# Altium PCB Tigershark 3D R1.8.PcbDoc (part 4 of 4)
Units mil, origin at the board's own origin, x right, y up, seen from the top; angles counter-clockwise.
Board outline 5500 x 4600 mil, 4 copper layers (Top Layer, Groun Plane, Power Plane, Bottom Layer), stack 61.73 mil thick; 307 components, 237 nets, 994 pads, 1215 vias.
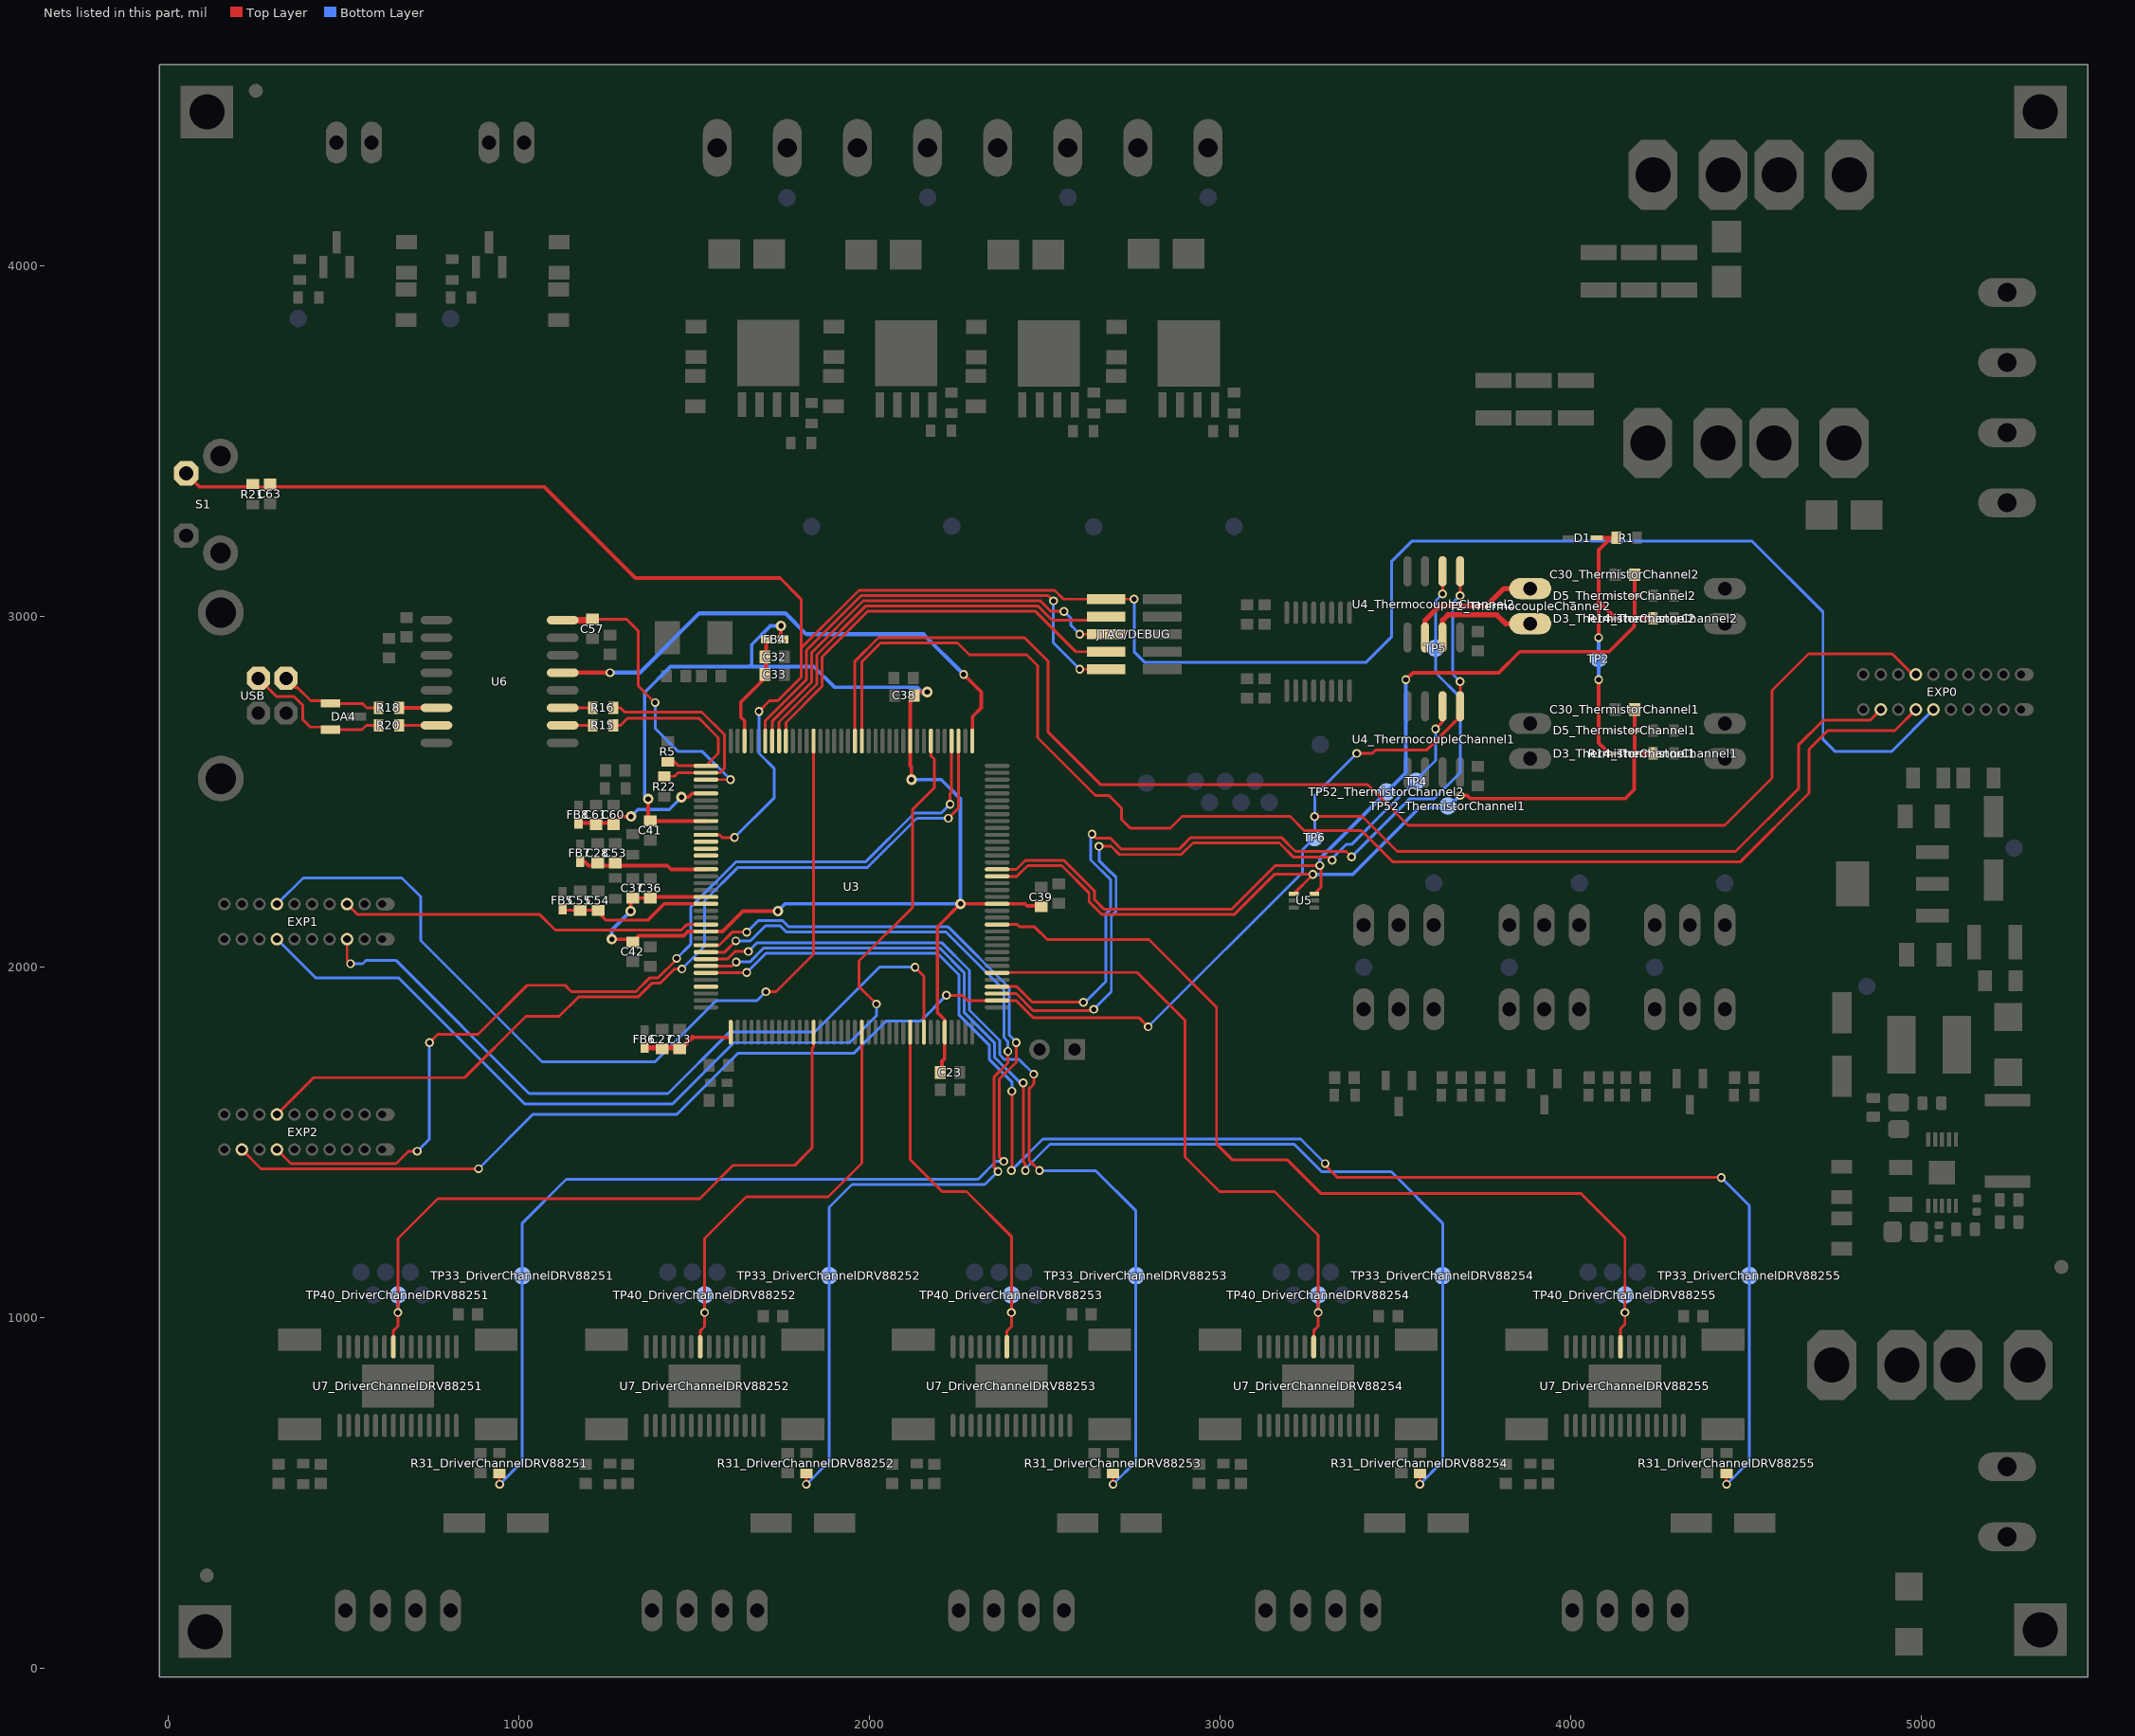
[diagram p6: the nets of this part, all layers, seen from the top]

## Via types
v1: diameter 25, hole 15, Top Layer to Bottom Layer, tented both sides, 594 vias
v2: diameter 30, hole 15, Top Layer to Bottom Layer, tented both sides, 518 vias
v3: diameter 19.68, hole 7.87, Top Layer to Bottom Layer, tented both sides, 75 vias
v4: diameter 50, hole 28, Top Layer to Bottom Layer, tented both sides, 10 vias
v5: diameter 45, hole 20, Top Layer to Bottom Layer, tented both sides, 9 vias
v6: diameter 30, hole 15, Top Layer to Bottom Layer, 9 vias

## Nets (pads, with @x,y where several pads share a name; then routed paths per layer and width w, separated by ;. In a path a pad name is that pad's centre, name@x,y a point inside that pad or via, vN(x,y) a via of type N, cw(c..) or ccw(c..) an arc to the next point about the centre after c; other vN are vias at no path point) (continued)
NetT2_ThermocoupleChannel2_1: T2_ThermocoupleChannel2.1 U4_ThermocoupleChannel2.3 | length 316.1
  Top Layer w15: U4_ThermocoupleChannel2.3@3635,2940.51 3635,2990 3650,3005 3789.49,3005 3814.49,2980 T2_ThermocoupleChannel2.1@3885,2980
NetT2_ThermocoupleChannel2_2: T2_ThermocoupleChannel2.2 U4_ThermocoupleChannel2.2 | length 386.5
  Top Layer w15: U4_ThermocoupleChannel2.2@3585,2940.51 3585,2989.49 3625.51,3030 3760,3030 3810,3080 T2_ThermocoupleChannel2.2@3885,3080
NRST: U3.69
OVREF: D1.2 D3_ThermistorChannel1.2 D3_ThermistorChannel2.2 R1.1 TP2.1 | length 769.5
  Top Layer w12: D1.2@4074.37,3225 4115,3225 4080,3190 4080,3043.43 ; v1(4080,2820) 4080,2640 4110,2610 D3_ThermistorChannel1.2@4128.43,2610 ; v1(4080,2940) 4080,3043.43 ; D3_ThermistorChannel2.2@4128.43,2995 4080,3043.43
  Bottom Layer w12: v1(4080,2820) v1(4080,2940)
R_N: DA4.1 R18.2 USB.2 | length 298.5
  Top Layer w8: USB.2@336,2824.21 362.71,2797.5 368.86,2797.5 406.46,2759.9 455.1,2759.9 DA4.1@462.6,2752.4 553.51,2752.4 565.91,2740 R18.2@599.59,2740
R_P: DA4.2 R20.2 USB.3 | length 432.3
  Top Layer w8: USB.3@257,2824.21 308.71,2772.5 358.51,2772.5 383.5,2747.51 383.5,2706.72 405.12,2685.1 455.1,2685.1 DA4.2@462.6,2677.6 552.6,2677.6 565,2690 R20.2@599.59,2690
REF1: R31_DriverChannelDRV88251.2 TP33_DriverChannelDRV88251.1 U3.63 | length 3755.7
  Top Layer w8: v1(945,525) R31_DriverChannelDRV88251.2@945,555.47 ; U3.63@1533.54,2062.68 1571.57,2062.68 1608.9,2100 v1@1653.9,2100 ; v1(2383,1446.15) 2370,1459.15 2370,1680 2418.9,1728.9 v1(2418.9,1785)
  Bottom Layer w8: v1(945,525) 1010,590 1010,1270 1135,1395 2310,1395 2361.15,1446.15 v1(2383,1446.15) ; v1(1650,2100) 1683.5,2133.5 1751.5,2133.5 1770,2115 2225,2115 2398.9,1941.1 2398.9,1805.96 2399.85,1805 2400.11,1805 2418.9,1786.21 v1(2418.9,1785)
REF2: R31_DriverChannelDRV88252.2 TP33_DriverChannelDRV88252.1 U3.64 | length 2876.5
  Top Layer w8: U3.64@1533.54,2042.99 1586.89,2042.99 v1(1618.9,2075) ; v1(1820,525) R31_DriverChannelDRV88252.2@1820,555.47 ; v1(2366.4,1417.5) 2355,1428.9 2355,1686.21 2395,1726.21 v1(2395,1760)
  Bottom Layer w8: v1(1618.9,2075) 1660,2075 1703.5,2118.5 1745.29,2118.5 1763.79,2100 2218.79,2100 2383.9,1934.89 2383.9,1799.74 2386.5,1797.14 2386.5,1796.18 2392.68,1790 2393.9,1790 2395,1788.9 v1(2395,1760) ; v1(1820,525) 1885,590 1885,1315 1950,1380 2328.9,1380 v1@2368.9,1420
REF3: R31_DriverChannelDRV88253.2 TP33_DriverChannelDRV88253.1 U3.65 | length 2652.7
  Top Layer w8: U3.65@1533.54,2023.31 1595.07,2023.31 1616.77,2045 v1@1653.9,2045 ; v1(2468.9,1695) 2468.9,1666.77 2455,1652.87 2455,1450 v1(2485,1420) ; v1(2695,525) R31_DriverChannelDRV88253.2@2695,555.47
  Bottom Layer w8: v1(1655,2045) 1680,2070 2206.36,2070 2285,1991.36 2285,1877.43 2371.5,1790.93 2371.5,1750.27 2385.27,1736.5 2427.4,1736.5 v1(2468.9,1695) ; v1(2485,1420) 2645,1420 2760,1305 2760,590 v1(2695,525)
REF4: R31_DriverChannelDRV88254.2 TP33_DriverChannelDRV88254.1 U3.66 | length 3547.7
  Top Layer w8: U3.66@1533.54,2003.62 1607.52,2003.62 v1@1618.9,2015 ; v1(2438.9,1670) 2438.9,1444.89 2445,1438.79 v1(2445,1420) ; v1(3570,525) R31_DriverChannelDRV88254.2@3570,555.47
  Bottom Layer w8: v1(1620,2015) 1658.79,2015 1698.79,2055 2200.15,2055 2270,1985.15 2270,1871.21 2356.5,1784.71 2356.5,1744.05 2430.55,1670 v1(2438.9,1670) ; v1(2445,1420) 2445,1425 2515,1495 3211.77,1495 3290.27,1416.5 3488.5,1416.5 3635,1270 TP33_DriverChannelDRV88254.1@3635,1120 3635,590 v1(3570,525)
REF5: R31_DriverChannelDRV88255.2 TP33_DriverChannelDRV88255.1 U3.67 | length 4478
  Top Layer w8: U3.67@1533.54,1983.94 v1@1652.83,1983.94 ; v1(2405,1420) 2406.5,1421.5 v1(2406.5,1646.5) 2410,1650 v1@2415,1645 ; v1@3300,1435 3335,1400 v1(4430,1400) ; v1(4445,525) R31_DriverChannelDRV88255.2@4445,555.47
  Bottom Layer w8: v1(1650,1985) 1705,2040 2193.93,2040 2255,1978.93 2255,1865 2341.5,1778.5 2341.5,1737.84 2406.5,1672.84 v1(2406.5,1646.5) ; v1(2405,1420) 2495,1510 3230,1510 v1(3300,1440) ; v1(4430,1400) 4510,1320 TP33_DriverChannelDRV88255.1@4510,1120 4510,590 v1(4445,525)
REF_EXP1: EXP1.8 U3.101 | length 2190.8
  Top Layer w8: EXP1.8@510,2080 510,2020 v1(520,2010) ; v1(2130,2000) 2155.59,1974.41 U3.101@2155.59,1814.65
  Bottom Layer w8: v1(520,2010) 555,2010 565,2020 649.08,2020 1029.08,1640 1425.92,1640 1600.92,1815 1843.23,1815 2028.23,2000 v1(2130,2000)
REF_EXP2: EXP1.13 U3.60 | length 1066.6
  Top Layer w8: EXP1.13@510,2180 520,2180 520,2170 539,2151 1059,2151 1104,2106 1463.37,2106 1479.1,2121.73 U3.60@1533.54,2121.73
RESET: C63.2 EXP0.5 JTAG/DEBUG.10 R21.1 S1.1 U3.47 | length 7061.5
  Top Layer w8: R21.1@232.47,3370 R21.1@241,3378.53 249.53,3370 282.44,3370 C63.2@290,3377.56 C63.2@297.56,3370 ; U3.47@1533.54,2377.64 1572.36,2377.64 1580,2370 v1(1615,2370) ; v1(1685,2730) 1715,2760 1738.79,2760 1805,2826.21 1805,2910 ; 1745,3110 1805,3050 1805,2910 ; v1(2755,3050) JTAG/DEBUG.10@2675.08,3050 2553.23,3050 2528.23,3075 1970,3075 1805,2910
  Top Layer w10: S1.1@51,3409 90,3370 R21.1@232.47,3370 ; C63.2@297.56,3370 1072.67,3370 1332.67,3110 1745,3110
  Bottom Layer w8: v1(1615,2370) 1728.9,2483.9 1728.9,2566.1 1685,2610 v1(1685,2730) ; v1(2755,3050) 2755,2900 2786,2869 3415.77,2869 3490,2943.23 3490,3158.23 3546.77,3215 4518.23,3215 4720,3013.23 4720,2650 4755,2615 4915,2615 EXP0.5@5035,2735
RXD0: EXP2.17 U3.3 | length 2573.5
  Top Layer w8: EXP2.17@310,1580 415,1685 845.15,1685 1020.15,1860 1115.15,1860 1170.15,1915 1340.15,1915 1380.15,1955 1403.79,1955 1443.79,1995 v1(1465,1995) ; v1(2225,2425) 2254.02,2454.02 U3.3@2254.02,2645.35
  Bottom Layer w8: v1(1465,1995) 1530,2060 1530,2190 1625,2285 1995,2285 2135,2425 v1(2225,2425)
RXD1: EXP0.17 U3.18 | length 3995.8
  Top Layer w8: U3.18@1958.74,2645.35 1958.74,2872.82 2025.92,2940 2442.43,2940 2510,2872.43 2510,2670.15 2658.65,2521.5 3420.63,2521.5 3452.19,2489.94 3452.19,2489.71 3536.9,2405 4439.85,2405 4575,2540.15 4575,2790.15 4678.85,2894 4917.01,2894 4964,2847.01 4964,2846 4975,2835 EXP0.17@4985,2835
SCLK: EXP0.2 EXP2.2 TP6.1 U3.110 U4_ThermocoupleChannel1.5 U4_ThermocoupleChannel2.5 | length 6544.2
  Top Layer w8: EXP2.2@210,1480 265,1425 v1(885,1425) ; v1(2220,1920) 2265,1920 2279.8,1905.2 U3.110@2364.25,1905.2 2417.38,1905.2 2466.07,1856.5 2768.5,1856.5 v1(2795,1830) ; v1(3270,2430) 3405.84,2430 3505.84,2330 4470.92,2330 4650,2509.08 4650,2633.79 4721.21,2705 4855,2705 EXP0.2@4885,2735 ; v1(3390,2610) 3435,2610 3445,2620 3590,2620 3685,2715 U4_ThermocoupleChannel1.5@3685,2744.49 v1(3685,2815) ; v1(3685,3060) U4_ThermocoupleChannel2.5@3685,3129.49
  Bottom Layer w8: v1(885,1425) 1040,1580 1450.77,1580 1625.77,1755 1956.21,1755 2047.71,1846.5 2146.5,1846.5 v1(2220,1920) ; v1(2795,1830) 3235,2270 3235,2335 TP6.1@3270,2370 v1(3270,2430) 3270,2490 v1(3390,2610) ; v1(3685,2815) 3664,2836 3664,3039 v1(3685,3060)
SHDN: U3.50
SPD: U3.1 U6.13 | length 1517.7
  Top Layer w10: v1(2268.9,2835) 2318.9,2785 2318.9,2740 2293.9,2715 U3.1@2293.9,2635
  Top Layer w12: U6.13@1125.12,2840 v1(1260,2840)
  Bottom Layer w12: v1(1260,2840) 1345,2840 1515,3010 1760,3010 1820.5,2949.5 2154.4,2949.5 v1(2268.9,2835)
STEP1: TP40_DriverChannelDRV88251.1 U3.85 U7_DriverChannelDRV88251.22 | length 1984.7
  Top Layer w8: U7_DriverChannelDRV88251.22@642.2,917.2 642.2,963.42 655,976.21 v1(655,1015) 655,1226.36 768.64,1340 1515.92,1340 1610.92,1435 1786.87,1435 1835.94,1484.07 1835.94,1768.37 1840.63,1773.06 U3.85@1840.63,1814.65
  Bottom Layer w8: v1(655,1015) TP40_DriverChannelDRV88251.1@655,1065
STEP2: TP40_DriverChannelDRV88252.1 U3.92 U7_DriverChannelDRV88252.22 | length 1275.5
  Top Layer w8: U7_DriverChannelDRV88252.22@1517.2,917.2 1517.2,962.2 1530,975 v1(1530,1015) 1530,1226.36 1648.64,1345 1882.57,1345 1978.43,1440.85 U3.92@1978.43,1814.65
  Bottom Layer w8: v1(1530,1015) TP40_DriverChannelDRV88252.1@1530,1065
STEP3: TP40_DriverChannelDRV88253.1 U3.99 U7_DriverChannelDRV88253.22 | length 1113
  Top Layer w8: U3.99@2116.22,1814.65 2116.22,1451.35 2207.57,1360 2276.97,1360 2405,1231.97 v1(2405,1015) 2405,975 2392.2,962.2 U7_DriverChannelDRV88253.22@2392.2,917.2
  Bottom Layer w8: v1(2405,1015) TP40_DriverChannelDRV88253.1@2405,1065
STEP4: TP40_DriverChannelDRV88254.1 U3.114 U7_DriverChannelDRV88254.22 | length 1828.6
  Top Layer w8: U3.114@2364.25,1983.94 2365.32,1985 2763.64,1985 2900,1848.64 2900,1458.64 2998.64,1360 3155.29,1360 3280,1235.29 v1(3280,1015) 3280,976.21 3267.2,963.42 U7_DriverChannelDRV88254.22@3267.2,917.2
  Bottom Layer w8: v1(3280,1015) TP40_DriverChannelDRV88254.1@3280,1065
STEP5: TP40_DriverChannelDRV88255.1 U3.121 U7_DriverChannelDRV88255.22 | length 2755.9
  Top Layer w8: U3.121@2364.25,2121.73 2422.05,2121.73 2428.79,2115 2471.21,2115 2507.59,2078.62 2797.3,2078.62 2990,1885.92 2990,1495.92 3035.92,1450 3192.57,1450 3287.57,1355 4028.64,1355 4155,1228.64 v1(4155,1015) 4155,981.21 4142.2,968.42 U7_DriverChannelDRV88255.22@4142.2,917.2
  Bottom Layer w8: v1(4155,1015) TP40_DriverChannelDRV88255.1@4155,1065
STEP_EXP1: EXP1.4 U3.7 | length 2905.8
  Top Layer w8: v1(2020,1895) 1970.61,1944.39 1970.61,2018.18 2122.75,2170.33 2122.75,2449.72 2184.9,2511.87 2184.9,2593.89 2175.28,2603.51 U3.7@2175.28,2645.35
  Bottom Layer w8: EXP1.4@310,2080 420,1970 656.65,1970 1016.65,1610 1438.35,1610 1613.35,1785 1943.23,1785 2020,1861.77 v1(2020,1895)
STEP_EXP2: EXP1.17 U3.24 | length 2588
  Top Layer w8: v1(1705,1930) 1733.79,1930 1840.63,2036.84 U3.24@1840.63,2645.35
  Bottom Layer w8: EXP1.17@310,2180 385,2255 666.36,2255 720,2201.36 720,2076.36 1066.36,1730 1388.64,1730 1563.64,1905 1680,1905 v1(1705,1930)
TC_CS1: TP4.1 U3.111 U4_ThermocoupleChannel1.6 | length 2097.9
  Top Layer w8: U3.111@2364.25,1924.88 2418.9,1924.88 2467.29,1876.5 2636.5,1876.5 v1(2640,1880) ; v1(2655,2345) 2689.6,2345 2713.1,2321.5 2889.44,2321.5 2922.94,2355 3168.93,2355 3210.43,2313.5 3311.5,2313.5 v1(3320,2305) ; v1(3615,2680) 3635,2700 U4_ThermocoupleChannel1.6@3635,2744.49
  Bottom Layer w8: v1(2640,1880) 2690,1930 2690,2146.1 2703.5,2159.6 2703.5,2256.61 2690.11,2270 2688.9,2270 2655,2303.9 v1(2655,2345) ; v1(3320,2305) 3320,2310 3360,2350 3375,2350 3489,2464 3489.91,2464 3511,2485.09 3511,2486 3615,2590 v1(3615,2680)
TC_CS2: TP5.1 U3.112 U4_ThermocoupleChannel2.6 | length 2620.6
  Top Layer w8: U3.112@2364.25,1944.57 2420.43,1944.57 2465,1900 v1(2610,1900) ; v1(2635,2380) 2646.5,2368.5 2687.31,2368.5 2719.31,2336.5 2883.23,2336.5 2916.73,2370 3175.15,2370 3215.15,2330 3360,2330 v1(3375,2315) ; v1(3635,3065) U4_ThermocoupleChannel2.6@3635,3129.49
  Bottom Layer w8: v1(2610,1900) 2615,1900 2675,1960 2675,2152.32 2688.5,2165.82 2688.5,2249.18 2631.5,2306.18 2631.5,2376.5 v1(2635,2380) ; v1(3375,2315) 3540,2480 3610,2480 3685,2555 3685,2770 3615,2840 3615,3045 v1(3635,3065)
TCK/SWDCLK: JTAG/DEBUG.4 U3.28 | length 1194
  Top Layer w8: U3.28@1761.89,2645.35 1761.89,2697.99 1865,2801.1 1865,2885.15 1994.85,3015 2473.49,3015 2588.49,2900 JTAG/DEBUG.4@2675.08,2900
TDI: JTAG/DEBUG.8 U3.29 | length 1193.9
  Top Layer w8: U3.29@1742.2,2645.35 1742.2,2699.52 1850,2807.32 1850,2891.36 1988.64,3030 2481.21,3030 2521.21,2990 2665.08,2990 JTAG/DEBUG.8@2675.08,3000
TDO/SWO: JTAG/DEBUG.6 U3.30 | length 1251
  Top Layer w8: U3.30@1722.52,2645.35 1722.52,2701.05 1835,2813.53 1835,2897.57 1982.43,3045 2487.43,3045 2517.43,3015 v1(2555,3015) ; v1(2600,2950) JTAG/DEBUG.6@2675.08,2950
  Bottom Layer w8: v1(2555,3015) 2575,2995 2575,2975 v1(2600,2950)
THERM_AN1: C30_ThermistorChannel1.2 D3_ThermistorChannel1.1 D5_ThermistorChannel1.2 R14_ThermistorChannel1.1 TP52_ThermistorChannel1.1 U3.128 U5.4 | length 2417.8
  Top Layer w8: U3.128@2364.25,2259.53 2365.25,2258.53 2419.74,2258.53 2451.21,2290 2548.79,2290 2626.5,2212.29 2626.5,2187.29 2663.79,2150 3040,2150 3155,2265 v1(3265,2265) ; U5.4@3210.47,2209.69 v1@3265,2264.21
  Top Layer w10: v1@3265,2264.21 v1(3265,2265) ; v1(3685,2490) 3705,2490 3714,2481 4156,2481 4181.57,2506.57 D3_ThermistorChannel1.1@4181.57,2610 R14_ThermistorChannel1.1@4235.47,2610 ; D3_ThermistorChannel1.1@4182.56,2610.98 C30_ThermistorChannel1.2@4182.56,2735
  Bottom Layer w10: v1(3265,2265) 3378.63,2265 3568.63,2455 3650,2455 v1(3685,2490)
THERM_AN2: C30_ThermistorChannel2.2 D3_ThermistorChannel2.1 D5_ThermistorChannel2.2 R14_ThermistorChannel2.1 TP52_ThermistorChannel2.1 U3.129 U5.3 | length 2692.6
  Top Layer w8: U3.129@2364.25,2279.21 2419.21,2279.21 2445,2305 2555,2305 2641.5,2218.5 2641.5,2193.5 2670,2165 3032.37,2165 3157.37,2290 v1(3285,2290) 3288.5,2286.5 3288.5,2228.66 U5.3@3269.53,2209.69
  Top Layer w10: v1(3530,2820) 3550,2840 3795,2840 3855,2900 4110,2900 4181.57,2971.57 D3_ThermistorChannel2.1@4181.57,2995 R14_ThermistorChannel2.1@4235.47,2995 ; D3_ThermistorChannel2.1@4182.56,2995.98 C30_ThermistorChannel2.2@4182.56,3120
  Bottom Layer w10: v1(3285,2290) 3285,2310 3530,2555 v1(3530,2820)
TMS/SWDIO: JTAG/DEBUG.2 U3.31 | length 1384
  Top Layer w8: U3.31@1702.83,2645.35 1702.83,2702.83 1820,2820 1820,2903.79 1976.21,3060 2510,3060 v1(2525,3045) ; v1(2600,2850) JTAG/DEBUG.2@2675.08,2850
  Bottom Layer w8: v1(2525,3045) 2525,2925 v1(2600,2850)
TXD0: EXP2.4 U3.4 | length 2783.4
  Top Layer w8: EXP2.4@310,1480 350,1440 650,1440 685,1475 v1(710,1475) ; v1(745,1785) 768.75,1808.75 884.04,1808.75 1023.79,1948.5 1131.5,1948.5 1150,1930 1333.93,1930 1373.93,1970 1397.57,1970 1450,2022.43 v1(1450,2025) ; v1(2230,2465) 2230,2495 2234.33,2499.33 U3.4@2234.33,2645.35
  Bottom Layer w8: v1(710,1475) 745,1510 v1(745,1785) ; v1(1450,2025) 1490,2065 1490,2171.21 1618.79,2300 1988.79,2300 2128.79,2440 2205,2440 v1(2230,2465)
TXD1: EXP0.4 U3.17 | length 3933.8
  Top Layer w8: U3.17@1978.43,2645.35 1978.43,2871.29 2032.13,2925 2251.77,2925 2285.27,2891.5 2448.5,2891.5 2480,2860 2480,2655 2645,2490 2683.23,2490 2718.5,2454.73 2718.5,2422.16 2744.16,2396.5 2858.37,2396.5 2891.87,2430 3200,2430 3240,2390 3403.41,2390 3493.41,2300 4483.35,2300 4680,2496.65 4680,2621.36 4733.64,2675 4925,2675 EXP0.4@4985,2735
UD_N: R18.1 U6.6 | length 106.2
  Top Layer w10: R18.1@658.65,2740 U6.6@764.88,2740
UD_P: R20.1 U6.7 | length 106.2
  Top Layer w8: R20.1@658.65,2690 U6.7@764.88,2690
UI_N: R16.2 U6.11 | length 85.4
  Top Layer w8: U6.11@1125.12,2740 1175,2740 R16.2@1210.47,2740
UI_P: R15.2 U6.10 | length 85.4
  Top Layer w8: U6.10@1125.12,2690 1190,2690 R15.2@1210.47,2690
UMCU_N: R16.1 R22.1 U3.38 | length 621.8
  Top Layer w8: R16.1@1269.53,2740 1290,2740 1302,2728 1521.35,2728 1586.9,2662.46 1586.9,2567.8 1573.9,2554.8 U3.38@1533.54,2554.8 1454.17,2554.8 1443.9,2544.53 R22.1@1418.9,2544.53
UMCU_P: R5.1 R15.1 U3.37 | length 544.8
  Top Layer w8: R15.1@1269.53,2690 1290,2690 1310,2710 1513.9,2710 1568.9,2655 1568.9,2609.84 U3.37@1533.54,2574.49 1454.88,2574.49 1443.9,2585.47 R5.1@1418.9,2585.47
VBUS: C57.2 U3.39 U6.16 | length 870.5
  Top Layer w8: C57.2@1210,2992.56 1307.44,2992.56 1340,2960 1340,2803.06 v1@1388.06,2755 ; U3.39@1533.54,2535.12 v1@1603.9,2535.12
  Top Layer w20: U6.16@1125.12,2990 C57.2@1207.44,2990
  Bottom Layer w8: v1(1388.9,2755) 1388.9,2681.1 1455,2615 1523.9,2615 v1(1603.9,2535)
VDDANA: C13.2 C27.2 FB6.2 U3.73 | length 257.4
  Top Layer w10: 1495,1800 U3.73@1603.9,1800
  Top Layer w15: FB6.2@1358.9,1770 1465,1770 1495,1800
VDDBU: C28.2 C53.2 FB7.2 U3.52 | length 373.8
  Top Layer w10: FB7.2@1168.9,2301.38 1187.52,2301.38 1198.9,2290 1423.9,2290 1434.68,2279.21 U3.52@1533.54,2279.21
VDDIN: C54.2 C55.2 FB5.2 U3.57 | length 458
  Top Layer w8: FB5.2@1120.12,2176.38 FB5.2@1124.05,2172.44 ; FB5.2@1122.83,2162.44 1220.12,2162.44 1248.56,2134 1367.9,2134 1368.9,2135 ; C54.2@1220.12,2172.44 C54.2@1227.56,2165
  Top Layer w10: 1368.9,2135 1414.68,2180.79 U3.57@1533.54,2180.79
VDDOUT: C23.2 C36.2 C37.2 C38.2 C39.2 C41.2 C42.2 FB4.1 U3.10 U3.45 U3.56 U3.61 U3.104 U3.124 | length 4514.7
  Top Layer w10: v2(1265,2080) C42.2@1327.44,2080 ; v2(1318.9,2160) 1318.9,2197.44 1368.9,2197.44 1371.93,2200.47 U3.56@1533.54,2200.47 ; C42.2@1323.9,2072.56 1341.34,2090 1470,2090 1482.05,2102.05 U3.61@1533.54,2102.05 1580.94,2102.05 1638.9,2160 v2(1738.9,2160) ; v2(1368.9,2480) 1368.9,2417.56 C41.2@1369.43,2417.03 ; C41.2@1369.45,2417.01 U3.45@1533.54,2417.01 ; FB4.1@1747.52,2935 v2(1747.52,2973.62) ; v2(2120,2535) 2120,2571.1 2116.22,2574.88 U3.10@2116.22,2645.35 2116.22,2769.76 2121.46,2775 2131.46,2785 v2(2165,2785) ; C23.2@2206.77,1705 2206.77,1731.77 2214.65,1739.65 U3.104@2214.65,1814.65 2214.65,1849.81 2193.9,1870.56 2193.9,2115 v2(2259.68,2180.79) U3.124@2364.25,2180.79 2444.12,2180.79 2449.91,2175 C39.2@2488.9,2175
  Bottom Layer w10: v2(1265,2080) 1265,2106.1 v2(1318.9,2160) ; v2(1368.9,2480) 1358.9,2490 1358.9,2783.9 1432.5,2857.5 1656.4,2857.5 ; v2(1738.9,2160) 1759.68,2180.79 v2(2259.68,2180.79) 2259.68,2480.32 2205,2535 v2(2120,2535) ; v2(1747.52,2973.62) 1717.52,2973.62 1663.9,2920 1663.9,2865 1656.4,2857.5 ; v2(2165,2785) 2158.9,2785 2153.9,2780 2134.9,2799 1899.9,2799 1841.4,2857.5 1656.4,2857.5
VDDPLL: C32.2 C33.2 FB4.2 U3.34 | length 326.1
  Top Layer w10: U3.34@1643.78,2645.35 1643.78,2702.53 1633,2713.31 1633,2756.34 1705.28,2828.62 1705.28,2930 FB4.2@1700.28,2935
VDDUTMI: C60.2 C61.2 FB8.2 U3.41 | length 390
  Top Layer w10: FB8.2@1168.9,2411.38 C60.2@1264.96,2411.38 ; C60.2@1276.46,2415 1291.46,2430 v2(1320,2430) ; v2(1463.9,2485) 1483.9,2485 1494.65,2495.75 U3.41@1533.54,2495.75
  Bottom Layer w10: v2@1323.9,2425 1323.9,2433.9 1340,2450 1428.9,2450 v2(1463.9,2485)
XIN32: U3.48
XOUT32: U3.49
pads on no net: FD1.1 FD2.1 FD3.1 JTAG/DEBUG.7 S1.3 S1.4 U3.32 U3.127 U3.136 U3.137 U3.138 U4_ThermocoupleChannel1.8 U4_ThermocoupleChannel2.8 U7_DriverChannelDRV88251.18 U7_DriverChannelDRV88251.19 U7_DriverChannelDRV88251.23 U7_DriverChannelDRV88251.27 U7_DriverChannelDRV88252.18 U7_DriverChannelDRV88252.19 U7_DriverChannelDRV88252.23 U7_DriverChannelDRV88252.27 U7_DriverChannelDRV88253.18 U7_DriverChannelDRV88253.19 U7_DriverChannelDRV88253.23 U7_DriverChannelDRV88253.27 U7_DriverChannelDRV88254.18 U7_DriverChannelDRV88254.19 U7_DriverChannelDRV88254.23 U7_DriverChannelDRV88254.27 U7_DriverChannelDRV88255.18 U7_DriverChannelDRV88255.19 U7_DriverChannelDRV88255.23 U7_DriverChannelDRV88255.27 USB.P$1 USB.P$2

## Polygon pours and split planes (outlines as drawn)
GND on Top Layer "Top Layer-No Net" (solid, remove dead copper, pour order 75): 225,0 655,0 655,100 460,100 460,505 290,505 290,610 310,610 310,720 815,720 815,660 870,660 870,720 1000,720 1000,645 970,645 970,590 870,590 870,540 910,540 910,575 970,575 970,500 845,500 845,100 655,100 655,0 1090,0 1090,1300 845,1300 845,875 500,875 500,1300 225,1300
+12VCC3 on Top Layer "Mechanical 15-No Net" (solid, remove dead copper, pour order 57): 3610,3975 3610,4035 3610,4550 4510,4550 4510,4030 4445,4030 4380,4030 4375,4025 4375,3975
GND on Top Layer "Mechanical 15-No Net" (solid, remove dead copper, pour order 54): 5450,3625 5160,3625 3690,3625 3610,3625 3610,3790 3610,3965 3690,3965 4385,3965 4385,4020 4510,4020 4510,3890 5080,3890 5080,3795 5450,3795
GND on Top Layer "Top Layer-No Net" (solid, remove dead copper, pour order 71): 3725,0 4155,0 4155,100 3960,100 3960,505 3790,505 3790,610 3810,610 3810,720 4315,720 4315,660 4370,660 4370,720 4500,720 4500,645 4470,645 4470,590 4370,590 4370,540 4410,540 4410,575 4470,575 4470,500 4345,500 4345,100 4155,100 4155,0 4590,0 4590,1300 4345,1300 4345,875 4000,875 4000,1300 3725,1300
GND on Top Layer "Top Layer-No Net" (solid, remove dead copper, pour order 72): 2850,0 3280,0 3280,100 3085,100 3085,505 2915,505 2915,610 2935,610 2935,720 3440,720 3440,660 3495,660 3495,720 3625,720 3625,645 3595,645 3595,590 3495,590 3495,540 3535,540 3535,575 3595,575 3595,500 3470,500 3470,100 3280,100 3280,0 3715,0 3715,1300 3470,1300 3470,875 3125,875 3125,1300 2850,1300
GND on Top Layer "Top Layer-No Net" (solid, remove dead copper, pour order 73): 1975,0 2405,0 2405,100 2210,100 2210,505 2040,505 2040,610 2060,610 2060,720 2565,720 2565,660 2620,660 2620,720 2750,720 2750,645 2720,645 2720,590 2620,590 2620,540 2660,540 2660,575 2720,575 2720,500 2595,500 2595,100 2405,100 2405,0 2840,0 2840,1300 2595,1300 2595,875 2250,875 2250,1300 1975,1300
GND on Top Layer "Top Layer-No Net" (solid, remove dead copper, pour order 74): 1100,0 1530,0 1530,100 1335,100 1335,505 1165,505 1165,610 1185,610 1185,720 1690,720 1690,660 1745,660 1745,720 1875,720 1875,645 1845,645 1845,590 1745,590 1745,540 1785,540 1785,575 1845,575 1845,500 1720,500 1720,100 1530,100 1530,0 1965,0 1965,1300 1720,1300 1720,875 1375,875 1375,1300 1100,1300
+12VCC2 on Top Layer "Top Layer-No Net" (solid, remove dead copper, pour order 56): 1660,4554.75 1440,4555 1440,3805 1535,3805 1535,3990 1660,3990
NetD18_1 on Top Layer "Top Layer-No Net" (solid, remove dead copper, pour order 65): 3465,4565 3600,4565 3600,4095 3600,3630 3465,3630 3065,3630 3065,3660 3015,3660 3015,3650 2810,3650 2810,3575 2670,3575 2670,3630 2745,3630 2745,3965 2865,3965 2865,4564.32
+12VCC2 on Top Layer "Top Layer-No Net" (solid, pour order 99): 4765,3370 4495,3370 4495,3620 3065,3620 3065,3275 4170,3275 4170,3160 4765,3160
+12VCC3 on Top Layer "Top Layer-No Net" (solid, remove dead copper, pour order 83): 2860,4554.32 2660,4555 2660,3805 2735,3805 2735,3985 2860,3985
NetD16_1 on Top Layer "Top Layer-No Net" (solid, remove dead copper, pour order 69): 2650,4554.32 2650,3660 2605,3660 2605,3655 2405,3655 2405,3575 2270,3575 2270,3630 2345,3630 2345,3975 2465,3975 2465,4554.32
+12VCC2 on Top Layer "Top Layer-No Net" (solid, remove dead copper, pour order 82): 2460,4555 2255,4555 2255,3805 2335,3805 2335,3985 2460,3985
NetD14_1 on Top Layer "Top Layer-No Net" (solid, remove dead copper, pour order 76): 2245,4555 2245,3660 2000,3660 2000,3570 1865,3570 1865,3650 1940,3650 1940,3970 2060,3970 2060,4555
+12VCC2 on Top Layer "Top Layer-No Net" (solid, remove dead copper, pour order 81): 2054,4554.75 1860,4555 1860,3800 1930,3800 1930,3985 2055,3985
NetD12_1 on Top Layer "Top Layer-No Net" (solid, remove dead copper, pour order 79): 1850,4554.75 1850,3655 1605,3655 1605,3575 1470,3575 1470,3655 1545,3655 1545,3975 1665,3975 1665,4554.75
GND on Top Layer "Top Layer-No Net" (solid, remove dead copper, pour order 84): 2814.5,3644.19 2814.5,3559.19 2669.5,3559.19 2669.5,3223.08 3004.5,3223.08 3004.5,3559.19 2954.5,3559.19 2954.5,3644.19
GND on Top Layer "Top Layer-No Net" (solid, remove dead copper, pour order 85): 2414.5,3644.19 2414.5,3559.19 2269.5,3559.19 2269.5,3223.08 2604.5,3223.08 2604.5,3559.19 2554.5,3559.19 2554.5,3644.19
GND on Top Layer "Top Layer-No Net" (solid, remove dead copper, pour order 86): 2008.5,3644.61 2008.5,3559.61 1863.5,3559.61 1863.5,3223.51 2198.5,3223.51 2198.5,3559.61 2148.5,3559.61 2148.5,3644.61
GND on Top Layer "Top Layer-No Net" (solid, remove dead copper, pour order 87): 1615,3645 1615,3560 1470,3560 1470,3223.89 1805,3223.89 1805,3560 1755,3560 1755,3645
GND on Top Layer "Top Layer-No Net" (solid, remove dead copper, pour order 58): 835,3930 885,3930 885,3920 930,3920 930,4035 945,4035 945,4105 990,4105 990,4035 1070,4035 1070,3800 1150,3800 1150,3475 835,3475
GND on Top Layer "Top Layer-No Net" (solid, remove dead copper, pour order 59): 400,3930 450,3930 450,3920 495,3920 495,4035 510,4035 510,4105 555,4105 555,4035 635,4035 635,3800 710,3800 710,3475 400,3475
+12VCC2 on Top Layer "Top Layer-No Net" (solid, remove dead copper, pour order 96): 1145,4050 1145,4540 975,4540 975,4115 1000,4115 1000,4050
+12VCC2 on Top Layer "Top Layer-No Net" (solid, remove dead copper, pour order 95): 710,4045 710,4550 540,4550 540,4115 565,4115 565,4045
NetD10_1 on Top Layer "Top Layer-No Net" (solid, remove dead copper, pour order 93): 935,4045 935,4115 965,4115 965,4580 720,4580 720,4045
NetD11_1 on Top Layer "Top Layer-No Net" (solid, remove dead copper, pour order 94): 500,4045 500,4115 530,4115 530,4580 300,4580 300,4045
GND on Top Layer "Top Layer-No Net" (solid, remove dead copper, pour order 62): 4925,175 4925,0 4930,-5 5250,-5 5250,200 5450,200 5450,465 5030,465 5030,175
NetF3_1 on Top Layer "Top Layer-No Net" (solid, remove dead copper, pour order 67): 5450,475 5450,1100 5030,1100 5030,475
+12VCC1 on Top Layer "Top Layer-No Net" (solid, remove dead copper, pour order 77): 5020,1100 4600,1100 4600,0 4910,0 4910,185 5020,185
NetF2_1 on Top Layer "Top Layer-No Net" (solid, remove dead copper, pour order 64): 5090,3800 5450,3800 5450,4550 4520,4550 4520,3900 5090,3900
GND on Top Layer "SMPS" (solid, pour order 55): 5111,1537 5139,1509 5139,1421 5189,1371 5312,1371 5312,1496 5263,1545 5261,1547 5128,1547 5111,1547
NetC40_2 on Top Layer "SMPS" (solid, pour order 53): 5045,1551 5067.77,1573.77 5067.77,1618 5174,1724.23 5174,1740 5190,1756 5266,1756 5304,1794 5304,1880 5286,1898 5204,1898 5091,1898 5045,1852 5034,1841 5034,1569 5034,1554 5037,1551
NetD2_A on Top Layer "SMPS" (solid, pour order 51): 5078,1554 5214,1554 5263,1554 5312,1603 5312,1716 5288,1740 5199,1740 5187,1728 5187,1711 5106,1630 5079,1603 5079,1557
NetF1_1 on Top Layer "Top Layer-No Net" (solid, remove dead copper, pour order 97): 5450,3375 5450,3620 4505,3620 4505,3469.66 4505,3397.27 4505,3375
NetF1_1 on Top Layer "Top Layer-No Net" (solid, remove dead copper, pour order 98): 5450,3375 5450,3620 4505,3620 4505,3469.66 4505,3397.27 4505,3375
GND on Top Layer "Mechanical 15-No Net" (solid, remove dead copper, pour order 52): 4775,3370 4775,3025 5450,3025 5450,3370
+12VCC2 on Bottom Layer "Mechanical 15-No Net" (solid, remove dead copper, pour order 68): 4495,3615 4495,3275 3190,3275 3190,3660 3075,3660 1470,3660 1470,4065 0,4065 0,4550 2650,4550 2645,4545 2645,3965 3600,3965 3600,3800 3600,3750 3600,3615 3685,3615
NetF1_1 on Bottom Layer "Mechanical 15-No Net" (solid, remove dead copper, pour order 80): 5470,3375 4505,3375 4505,3450 4505,3615 5470,3615
GND on Bottom Layer "Mechanical 15-No Net" (solid, remove dead copper, pour order 70): 5470,2965 5470,3370 4775,3370 4775,2965
GND on Bottom Layer "Top Layer-No Net" (solid, remove dead copper, pour order 88): 3725,1400 3725,475 4590,475 4590,1400
GND on Bottom Layer "Top Layer-No Net" (solid, remove dead copper, pour order 89): 2850,1400 2850,475 3715,475 3715,1400
GND on Bottom Layer "Top Layer-No Net" (solid, remove dead copper, pour order 90): 1975,1400 1975,475 2840,475 2840,1400
GND on Bottom Layer "Top Layer-No Net" (solid, remove dead copper, pour order 91): 1100,1400 1100,475 1965,475 1965,1400
GND on Bottom Layer "Top Layer-No Net" (solid, pour order 92): 225,1400 225,475 1090,475 1090,1400
+12VCC1 on Bottom Layer "Top Layer-No Net" (solid, remove dead copper, pour order 100): 4600,1100 5020,1100 5020,0 225,0 225,465 4600,465
+12VCC3 on Bottom Layer "Top Layer-No Net" (solid, remove dead copper, pour order 60): 2675,4550 2675,3975 4370,3975 4370,4070 4510,4070 4510,4550
GND on Bottom Layer "Top Layer-No Net" (solid, remove dead copper, pour order 78): 5450,3625 3690,3625 3610,3625 3610,3795 3610,3960 3690,3960 4385,3960 4385,4020 4510,4020 4510,3895 5085,3895 5085,3795 5450,3795
NetF2_1 on Bottom Layer "Top Layer-No Net" (solid, remove dead copper, pour order 63): 5090,3800 5450,3800 5450,4550 4520,4550 4520,3900 5090,3900
GND on Bottom Layer "Top Layer-No Net" (solid, remove dead copper, pour order 61): 4925,175 4925,0 4930,-5 5250,-5 5250,200 5450,200 5450,465 5030,465 5030,175
NetF3_1 on Bottom Layer "Top Layer-No Net" (solid, remove dead copper, pour order 66): 5450,475 5450,1100 5030,1100 5030,475
INPUT_GND on Groun Plane (split plane): 939.9,2455.1 -4.9,2455.1 -4.9,3094.9 939.9,3094.9
GND on Groun Plane (split plane): 5454.9,-4.9 -4.9,-4.9 -4.9,2444.9 945,2444.9 946.95,2445.29 948.6,2446.4 949.71,2448.05 950.1,2450 950.1,3100 949.71,3101.95 948.6,3103.6 946.95,3104.71 945,3105.1 -4.9,3105.1 -4.9,4554.9 5454.9,4554.9
NetF1_1 on Power Plane (split plane): 5454.9,3370.1 4505.1,3370.1 4505.1,3614.9 5454.9,3614.9
+5VCC on Power Plane (split plane): 5454.9,1170.1 5033.1,1170.1 5033.1,1346 5032.71,1347.95 5031.6,1349.6 5029.95,1350.71 5028,1351.1 4720.1,1351.1 4720.1,1906.9 5454.9,1906.9
+12VCC3 on Power Plane (split plane): 4494.9,3875.1 3345.1,3875.1 3345.1,4090 3344.71,4091.95 3343.6,4093.6 3341.95,4094.71 3340,4095.1 2655.1,4095.1 2655.1,4554.9 4494.9,4554.9
NetF2_1 on Power Plane (split plane): 5454.9,3625.1 4505.1,3625.1 4505.1,4554.9 5454.9,4554.9
NetF3_1 on Power Plane (split plane): 5454.9,475.1 5032.1,475.1 5032.1,1159.9 5454.9,1159.9
3.3VCC on Power Plane (split plane): 4260.9,741.1 4040.1,741.1 4040.1,864.9 4260.9,864.9
3.3VCC on Power Plane (split plane): 3390.9,743.1 3170.1,743.1 3170.1,864.9 3390.9,864.9
+12VCC2 on Power Plane (split plane): 2644.9,4090 2645.29,4088.05 2646.4,4086.4 2648.05,4085.29 2650,4084.9 3334.9,4084.9 3334.9,3870 3335.29,3868.05 3336.4,3866.4 3338.05,3865.29 3340,3864.9 4494.9,3864.9 4494.9,3620 4494.9,3365 4494.9,3265.1 3040.1,3265.1 3040.1,3673.89 3039.71,3675.84 3038.6,3677.5 3036.95,3678.6 3035,3678.99 1475.1,3678.99 1475.1,4055 1474.71,4056.95 1473.6,4058.6 1471.95,4059.71 1470,4060.1 -4.9,4060.1 -4.9,4554.9 2644.9,4554.9
3.3VCC on Power Plane (split plane): 1464.9,3675 1465.01,3674.45 1464.9,3673.89 1465.29,3671.94 1466.4,3670.29 1468.05,3669.18 1470,3668.79 3029.9,3668.79 3029.9,3260 3030.29,3258.05 3031.4,3256.4 3033.05,3255.29 3035,3254.9 4500,3254.9 4501.95,3255.29 4503.6,3256.4 4504.71,3258.05 4505.1,3260 4505.1,3359.9 5454.9,3359.9 5454.9,1917.1 4715,1917.1 4713.05,1916.71 4711.4,1915.6 4710.29,1913.95 4709.9,1912 4709.9,1351.1 4419.71,1351.1 4419.7,1351.1 4418.73,1350.9 4417.76,1350.71 4417.75,1350.7 4416.94,1350.16 4416.11,1349.6 4416.1,1349.6 4415.55,1348.77 4415,1347.95 4415,1347.94 4414.81,1346.96 4414.62,1346 4414.62,1345.99 4415.89,875.1 2292.87,875.1 2291.95,875.71 2290,876.1 2288.05,875.71 2287.13,875.1 1643.11,875.1 1642.6,875.6 1640.95,876.71 1639,877.1 1637.05,876.71 1635.4,875.6 1635.06,875.1 -4.9,875.1 -4.9,4049.9 1464.9,4049.9
3.3VCC on Power Plane (split plane): 1636.9,742.1 1422.1,742.1 1422.1,864.9 1636.9,864.9
+12VCC1 on Power Plane (split plane): 5022.9,1167.87 5022.29,1166.95 5021.9,1165 5021.9,470 5022.29,468.05 5023.4,466.4 5025.05,465.29 5027,464.9 5454.9,464.9 5454.9,-4.9 -4.9,-4.9 -4.9,864.9 536.9,864.9 536.9,736 537.29,734.05 538.4,732.4 539.4,731.4 541.05,730.29 543,729.9 767,729.9 768.95,730.29 770.6,731.4 771.71,733.05 772.1,735 772.1,864.9 1411.9,864.9 1411.9,737 1412.29,735.05 1413.4,733.4 1415.05,732.29 1417,731.9 1642,731.9 1643.95,732.29 1645.6,733.4 1646.71,735.05 1647.1,737 1647.1,864.9 2284.9,864.9 2284.9,733 2285.29,731.05 2286.4,729.4 2288.05,728.29 2290,727.9 2522,727.9 2523.95,728.29 2525.6,729.4 2526.71,731.05 2527.1,733 2527.1,864.9 3159.9,864.9 3159.9,738 3160.29,736.05 3161.4,734.4 3163.05,733.29 3165,732.9 3396,732.9 3397.95,733.29 3399.6,734.4 3400.71,736.05 3401.1,738 3401.1,864.9 4029.9,864.9 4029.9,736 4030.29,734.05 4031.4,732.4 4033.05,731.29 4035,730.9 4265,730.9 4266.95,731.29 4268.6,732.4 4269.6,733.4 4270.71,735.05 4271.1,737 4271.1,864.9 4421,864.9 4421.01,864.9 4421.97,865.09 4422.95,865.29 4422.96,865.29 4422.96,865.3 4423.77,865.84 4424.6,866.4 4424.61,866.4 4425.16,867.22 4425.71,868.05 4425.71,868.06 4425.72,868.06 4425.91,869.04 4426.1,870 4426.1,870.01 4424.83,1340.9 5022.9,1340.9
3.3VCC on Power Plane (split plane): 2516.9,738.1 2295.1,738.1 2295.1,864.9 2516.9,864.9
3.3VCC on Power Plane (split plane): 761.9,740.1 547.1,740.1 547.1,864.9 761.9,864.9

## Keep-outs
Keep-Out Layer:
  lines w10: 0,0 5450,0 5450,4550 0,4550 0,0

## Other copper
Top Layer:
  text "AVR" at 215,3730 h160 r90
Bottom Layer:
  text "G" at 175,1340 h150 r90
  text "Tigershark 3D V1" at 135,1155 h130 r90
Groun Plane (plane layer: these items are gaps in the copper):
  lines w10: -30,2450 75,2450 945,2450 945,3100 45,3100 -30,3100
Power Plane (plane layer: these items are gaps in the copper):
  lines w10: -25,-25 -24,870 4421,870 4419.71,1346 4715,1346 ; -25,4055 815,4055 1470,4055 1470,3675 ; 542,870 542,736 543,735 767,735 767,870 ; 1417,870 1417,737 1642,737 1642,869 1639,872 ; 1470,3673.89 2715,3673.89 3035,3673.89 3035,3260 3350,3260 4500,3260 4500,3365 ; 2290,871 2290,733 2522,733 2522,870 ; 2650,4588.11 2650,4090 3340,4090 3340,3870 3640,3870 ; 3165,870 3165,738 3396,738 3396,870 ; 3620,3870 4500,3870 ; 4035,870 4035,736 4265,736 4266,737 4266,870 ; 4500,4585 4500,3620 ; 5027,1165 5027,470 5478,470 ; 5475,1912 4715,1912 4715,1346 ; 5485,1165 5028,1165 5028,1346 4840.5,1346 4715,1346 ; 5485,3365 5115,3365 4500,3365 ; 5485,3620 4500,3620 ; 4500,3365 4500,3620

## Silkscreen, mask and mechanical layers (free items; w line width, h text height)
Top Overlay:
  lines w10: 10,3515 375,3515 ; 225,3040 1330,3040 ; 1250,4250 1250,4500 ; 2520,3090 3020,3090 ; 3090,1770 3295,1770 ; 3095,2040 3295,2040 ; 3205,4050 3205,4535 ; 3310,1465 3935,1465 ; 3490,3265 4095,3265 ; 4145,3265 4645.25,3265 ; 15,15 15,195 195,195 195,15 170,15 15,15 ; 20,4350 175,4350 200,4350 200,4530 20,4530 20,4350 ; 5250,20 5430,20 5430,200 5250,200 5250,20 ; 5250,4350 5250,4530 5430,4530 5430,4350 5250,4350
  lines w20: 75,3700 250,3700 250,3975 75,3975 75,3700
  text "S" at 3360,4385 h1200
  text "HEATBED 15A" at 4115,4370 h120
  text "S" at 3620,4365 h100
  text "FANs" at 1235,4245 h130 r90
  text "FAN-1" at 810,4125 h120
  text "FAN-0" at 370,4120 h120
  text "HEAT-0" at 1505,4113.11 h100
  text "HEAT-1" at 1890,4112.11 h100
  text "HEATBED" at 2701,4112.32 h100
  text "HEAT-2" at 2304,4111.11 h100
  text "HEATERs" at 3185,4055 h130 r90
  text "b" at 3195,3655 h270
  text "HEATBED" at 5011,3628 h100 r90
  text "12V - 24V" at 5081,3623 h100 r90
  text "HTR MOSFETs" at 4100,3605 h120
  text "RESET" at 10,3530 h155
  text "Thermocouples" at 3475,3275 h110
  text "Thermistors" at 4140,3275 h110
  text "MOSFETs" at 5001,3228 h100 r90
  text "12V - 24V" at 5081,3228 h100 r90
  text "TC-0" at 3765,3190 h90
  text "THM-0" at 4315,3190 h90
  text "GALVANIC USB ISOLATION" at 220,3055 h110
  text "K-Smart Port" at 4685,2945 h155
  text "THM-1" at 4315,2810 h90
  text "TC-1" at 3765,2805 h90
  text "Tigershark" at 2450,2500 h220
  text "Prototype Rev 1V9" at 2860,2440 h80
  text "Designed By" at 2648.57,2380 h90
  text "Adam Vadala-Roth" at 2535,2300 h90
  text "GPIO Port" at 10,2290 h155
  text "X" at 3495,2280 h300
  text "Y" at 3910,2280 h300
  text "Z" at 4360,2280 h300
  text "3.3V LDO" at 5425,2055 h150 r90
  text "MAX" at 3090,2050 h120
  text "Logic Supply" at 4740,2050 h90 r90
  text "ERASE" at 2435,1825 h75
  text "MIN" at 3090,1780 h120
  text "Smart Port" at 5,1690 h155
  text "ENDSTOPS" at 3305,1475 h155
  text "+5V DCDC" at 5435,1330 h150 r90
  text "Motors/Logic" at 4620,990 h120
  text "STEPPER DRIVERS" at 120,360 h130 r90
  text "2.5A Per Phase" at 210,360 h130 r90
  text "PWR IN 2" at 5010,304.5 h90 r90
  text "12V - 24V" at 5075,304.5 h90 r90
  text "X" at 245,20 h300
  text "Y" at 1120,20 h300
  text "Z" at 1995,20 h300
  text "E" at 2865,20 h300
  text "0" at 3560,20 h300
  text "E" at 3755,20 h300
  text "1" at 4435,20 h300
Bottom Overlay:
  drawing of 2 lines, arcs and shapes, not listed
  text "Tigershark 3D" at 4195,1370 h250
  text "Powered by TinyG2CORE" at 4505,1215 h140
  text "Based On the Work of Ultimachine," at 4505,920 h135
  text "Arduino, RepRap, and Synthetos.com" at 4510,830 h135
  text "Developed by Adam Vadala-Roth in" at 4505,725 h135
  text "collaboration with Johnny Russel" at 4500,625 h135
  text "and Alden Hart" at 4495,530 h135
  text "#YOLO" at 3460,375 h200
  text "G" at 3780,260 h310
  text "S" at 4195,260 h2000
  text "S" at 4510,230 h175
  text "Released as Open Source Hardware Under the CERN Open Hardware Liscense" at 4500,25 h125
Top Solder:
  text "AVR" at 215,3730 h160 r90
Mechanical 15:
  lines w10: -25,-25 -25,4575 5475,4575 5475,735 5475,375 5475,-25 -25,-25

## Text inside footprints (layer, text, board x,y; h text height)
FAN-1: Mechanical 16 "1" at 1077.5,4415.08 h62 r180
FAN-2: Mechanical 16 "1" at 642.5,4415.08 h62 r180
FETS: Top Overlay "4" at 2066,4252.32 h77.5; Top Overlay "3" at 1866,4252.32 h77.5; Top Overlay "2" at 1666,4252.32 h77.5; Top Overlay "1" at 1481,4252.32 h77.5; Top Overlay "5" at 2266,4252.32 h77.5; Top Overlay "6" at 2466,4252.32 h77.5; Top Overlay "7" at 2666,4252.32 h77.5; Top Overlay "8" at 2866,4252.32 h77.5
"Heat Power": Top Overlay "4" at 5160,3425 h77.5 r270; Top Overlay "3" at 5160,3625 h77.5 r270; Top Overlay "2" at 5160,3825 h77.5 r270; Top Overlay "1" at 5160,4010 h77.5 r270
MAX1_EndstopChannel1: Mechanical 16 "1" at 3347.5,1817.5 h62
MAX1_EndstopChannel2: Mechanical 16 "1" at 4177.5,1817.5 h62
MAX1_EndstopChannel3: Mechanical 16 "1" at 3762.5,1817.5 h62
MIN1_EndstopChannel1: Mechanical 16 "1" at 3672.5,2182.5 h62 r180
MIN1_EndstopChannel2: Mechanical 16 "1" at 4502.5,2182.5 h62 r180
MIN1_EndstopChannel3: Mechanical 16 "1" at 4087.5,2182.5 h62 r180
"Motor Power": Top Overlay "2" at 5160,475 h77.5 r270; Top Overlay "1" at 5160,660 h77.5 r270
P2_ThermistorChannel1: Mechanical 16 "1" at 4502.5,2532.5 h62 r90
P2_ThermistorChannel2: Mechanical 16 "1" at 4502.5,2917.5 h62 r90
T2_ThermocoupleChannel1: Mechanical 16 "1" at 3947.5,2532.5 h62 r90
T2_ThermocoupleChannel2: Mechanical 16 "1" at 3947.5,2917.5 h62 r90
U3: Top Overlay "TQFP 144" at 1841.95,2327.36 h49.6 r270; Top Overlay "R" at 1897.46,2082.73 h37.2 r270